# Altium PCB Upperarm2_GPT_Backup.PcbDoc
Units mil, origin at the board's own origin, x right, y up, seen from the top; angles counter-clockwise.
Board outline 17000 x 4500 mil, 2 copper layers (Top Layer, Bottom Layer); 8 components, 9 nets, 98 pads, 0 vias.
Unrouted connection lines stored in the file: 18.
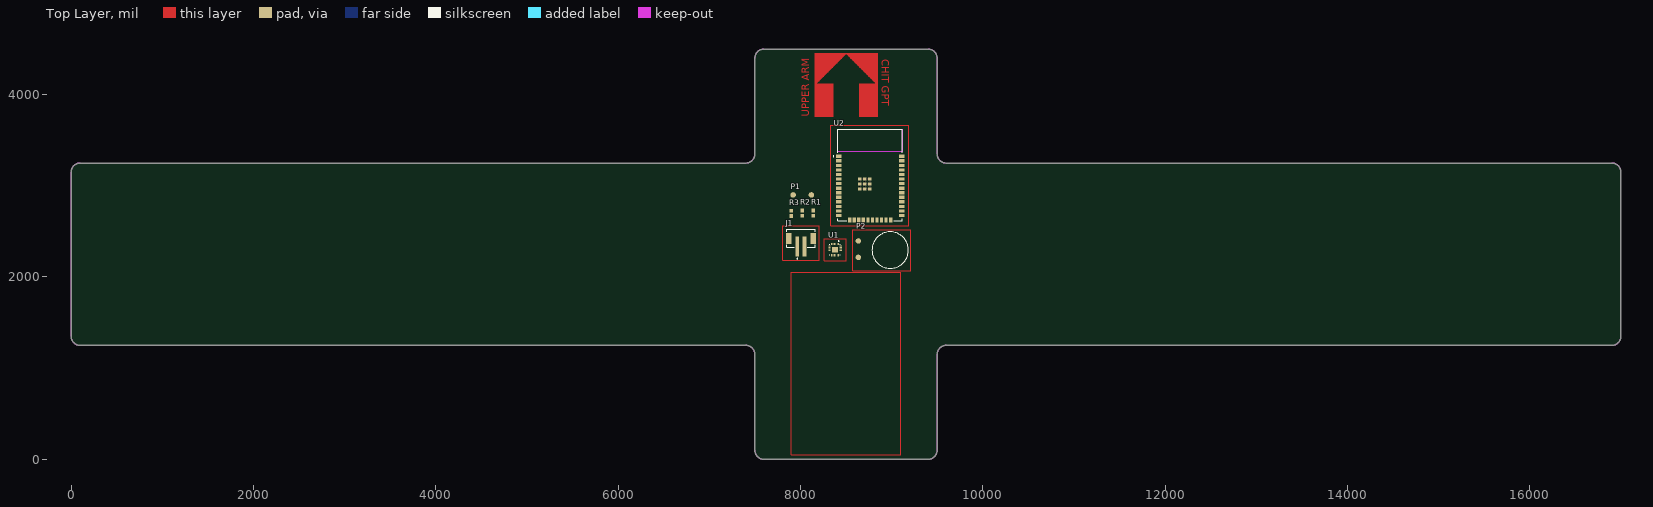
[diagram p0: Top Layer view]
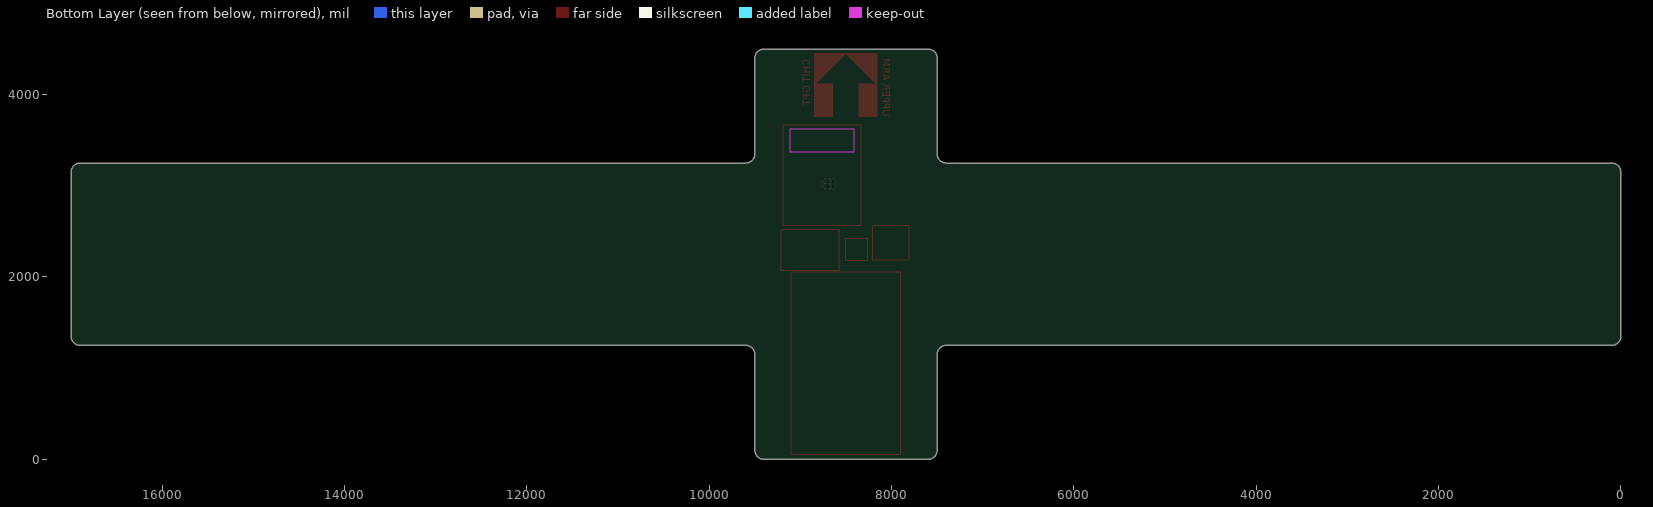
[diagram p1: Bottom Layer view, seen from below]

## Layer stack, top to bottom
Top Solder: solder mask 0.4724, FC-001, Dk 4
Top Solder: solder mask 0.4, Solder Resist, Dk 3.5
Top Layer: signal copper 1.4
Dielectric 1: dielectric 12.6, FR-4, Dk 4.8
Bottom Layer: signal copper 1.4
Flex Bottom Coverlay: solder mask 0.4, Solder Resist, Dk 3.5
Flex Bottom Coverlay: solder mask 0.4724, FC-001, Dk 4

## Board outline
7500,100 7500,1150 ccw(c7400,1150) 7400,1250 100,1250 cw(c100,1350) 0,1350 0,3150 cw(c100,3150) 100,3250 7400,3250 ccw(c7400,3350) 7500,3350 7500,4400 cw(c7600,4400) 7600,4500 9400,4500 cw(c9400,4400) 9500,4400 9500,3350 ccw(c9600,3350) 9600,3250 16900,3250 cw(c16900,3150) 17000,3150 17000,1350 cw(c16900,1350) 16900,1250 9600,1250 ccw(c9600,1150) 9500,1150 9500,100 cw(c9400,100) 9400,0 7600,0 cw(c7600,100)
board region Main: 9250,0 7750,0 7750,4500 9250,4500
board region "Left Strap": 9250,4500 9400,4500 9409.85,4500 9429.17,4496.16 9447.37,4488.62 9463.75,4477.68 9477.68,4463.75 9488.62,4447.37 9496.16,4429.17 9500,4409.85 9500,4400 9500,3350 9500.48,3340.2 9504.31,3320.97 9511.81,3302.86 9522.7,3286.56 9536.56,3272.7 9552.86,3261.81 9570.97,3254.31 9590.2,3250.48 9600,3250 16900,3250 16909.85,3250 16929.17,3246.16 16947.37,3238.62 16963.75,3227.68 16977.68,3213.75 16988.62,3197.37 16996.16,3179.17 17000,3159.85 17000,3150 17000,1350 17000,1340.15 16996.16,1320.83 16988.62,1302.63 16977.68,1286.25 16963.75,1272.32 16947.37,1261.38 16929.17,1253.84 16909.85,1250 16900,1250 9600,1250 9590.2,1249.52 9570.97,1245.69 9552.86,1238.19 9536.56,1227.3 9522.7,1213.44 9511.81,1197.14 9504.31,1179.03 9500.48,1159.8 9500,1150 9500,100 9500,90.15 9496.16,70.83 9488.62,52.63 9477.68,36.25 9463.75,22.32 9447.37,11.38 9429.17,3.84 9409.85,0 9400,0 9250,0
board region "Right Strap": 7750,0 7600,0 7590.15,0 7570.83,3.84 7552.63,11.38 7536.25,22.32 7522.32,36.25 7511.38,52.63 7503.84,70.83 7500,90.15 7500,100 7500,1150 7499.52,1159.8 7495.69,1179.03 7488.19,1197.14 7477.3,1213.44 7463.44,1227.3 7447.14,1238.19 7429.03,1245.69 7409.8,1249.52 7400,1250 100,1250 90.15,1250 70.83,1253.84 52.63,1261.38 36.25,1272.32 22.32,1286.25 11.38,1302.63 3.84,1320.83 0,1340.15 0,1350 0,3150 0,3159.85 3.84,3179.17 11.38,3197.37 22.32,3213.75 36.25,3227.68 52.63,3238.62 70.83,3246.16 90.15,3250 100,3250 7400,3250 7409.8,3250.48 7429.03,3254.31 7447.14,3261.81 7463.44,3272.7 7477.3,3286.56 7488.19,3302.86 7495.69,3320.97 7499.52,3340.2 7500,3350 7500,4400 7500,4409.85 7503.84,4429.17 7511.38,4447.37 7522.32,4463.75 7536.25,4477.68 7552.63,4488.62 7570.83,4496.16 7590.15,4500 7600,4500 7750,4500

## Design rules (kind name [scope] priority, off if disabled: settings)
Clearance [All] p1: gap=10 ignorepadtopadclearanceinfootprint=FALSE except(0: Arc-Hole Track-Hole SMDPad-Hole THPad-Hole Via-Hole Fill-Hole Poly-Hole Region-Hole Text-Hole)
PolygonConnect [All] p1: connectstyle=Relief reliefconductorwidth=10 reliefentries=4 polygonreliefangle="90 Angle" airgapwidth=10
RoutingVias [All] p1: holewidth=28 width=50 viastyle="Through Hole" minholewidth=28 minwidth=50 maxholewidth=28 maxwidth=50
SolderMaskExpansion [All] p1: expansion=4 istentingtop=FALSE
Width [All] p1: maxlimit=10 minlimit=10 preferedwidth=10 substack1={0EA1E346-DF71-40D0-BE09-5F43E7521303}
30 further rules are at their usual default settings.

## Components (designator, comment, footprint, x,y, rotation, side; value= is the part's Value field where it differs from the comment)
J1 "B2B-PH-SM4-TB" JST_B2B-PH-SM4-TB 8005.63,2423.58 r0 top
P1 "Strain Gauge" "Strain Gauge" 8020,2900 r0 top
P2 "Vibe Motor" "Vibe Motor" 8985,2295 r90 top
R1 "RC0603FR-07100RL" RESC1607X60N 8140,2700 r90 top
R2 "RC0603FR-07100RL" RESC1607X60N 8020,2701.06 r90 top
R3 "RC0603FR-07100RL" RESC1607X60N 7900,2698.94 r90 top
U1 "MPU-6500" QFN40P300X300X95-25N 8380,2300 r270 top
U2 "ESP32-WROOM-32E_(16MB)" XCVR_ESP32-WROOM-32E_(16MB) 8765,3117.13 r0 top

## Footprints (in the part's own frame and the unit in brackets; to place one, negate y for a bottom-side part, rotate by r counter-clockwise, add the part's x,y. Pads: shape width x height; smd on the part's side, far side on the other; paste and mask are expansions set on the pad)
JST_B2B-PH-SM4-TB [mm]
  rect 1x5.5 smd: 1(-1,-2.25) 2(1,-2.25)
  rect 1.6x3 smd: S1(-3.4,0) S2(3.4,0)
  silkscreen extent -3.98,-5.76 3.98,2.5, body extent -3.98,-4.5 3.98,2.5, height 6.75
QFN40P300X300X95-25N [mm]
  rrect25% 0.64x0.22 smd: 1(-1.545,1) 2(-1.545,0.6) 3(-1.545,0.2) 4(-1.545,-0.2) 5(-1.545,-0.6) 6(-1.545,-1) 13(1.545,-1) 14(1.545,-0.6) 15(1.545,-0.2) 16(1.545,0.2) 17(1.545,0.6) 18(1.545,1)
  rrect25% 0.22x0.64 smd: 7(-1,-1.545) 8(-0.6,-1.545) 9(-0.2,-1.545) 10(0.2,-1.545) 11(0.6,-1.545) 12(1,-1.545) 19(1,1.545) 20(0.6,1.545) 21(0.2,1.545) 22(-0.2,1.545) 23(-0.6,1.545) 24(-1,1.545)
  rect 1.54x1.7 smd paste-2: 25(0,0)
  silkscreen extent -2.48,-1.5 1.5,1.5
RESC1607X60N [mm]
  rect 1.04x1.02 smd: 1(-0.735,0) 2(0.735,0)
"Strain Gauge" [mil]
  round 60 smd: 1(-100,0) 2(100,0)
"Vibe Motor" [mil]
  round 60 smd: 1(-80,350) 2(100,350)
  silkscreen extent -200,-200 200,200
XCVR_ESP32-WROOM-32E_(16MB) [mm]
  rect 1.5x0.9 smd: 1(-8.75,5.26) 2(-8.75,3.99) 3(-8.75,2.72) 4(-8.75,1.45) 5(-8.75,0.18) 6(-8.75,-1.09) 7(-8.75,-2.36) 8(-8.75,-3.63) 9(-8.75,-4.9) 10(-8.75,-6.17) 11(-8.75,-7.44) 12(-8.75,-8.71) 13(-8.75,-9.98) 14(-8.75,-11.25) 25(8.75,-11.25) 26(8.75,-9.98) 27(8.75,-8.71) 28(8.75,-7.44) 29(8.75,-6.17) 30(8.75,-4.9) 31(8.75,-3.63) 32(8.75,-2.36) 33(8.75,-1.09) 34(8.75,0.18) 35(8.75,1.45) 36(8.75,2.72) 37(8.75,3.99) 38(8.75,5.26)
  rect 0.9x1.5 smd: 15(-5.715,-12.5) 16(-4.445,-12.5) 17(-3.175,-12.5) 18(-1.905,-12.5) 19(-0.635,-12.5) 20(0.635,-12.5) 21(1.905,-12.5) 22(3.175,-12.5) 23(4.445,-12.5) 24(5.715,-12.5)
  rect 0.9x0.9 smd: 39_1(-2.9,-1.06) 39_2(-1.5,-1.06) 39_3(-0.1,-1.06) 39_4(-2.9,-2.46) 39_5(-1.5,-2.46) 39_6(-0.1,-2.46) 39_7(-2.9,-3.86) 39_8(-1.5,-3.86) 39_9(-0.1,-3.86)
  round 0.3 hole 0.2 mask+0: 39_10(-2.2,-1.06) 39_11(-0.8,-1.06) 39_12(-2.9,-1.76) 39_13(-1.5,-1.76) 39_14(-0.1,-1.76) 39_15(-2.2,-2.46) 39_16(-0.8,-2.46) 39_17(-2.9,-3.16) 39_18(-1.5,-3.16) 39_19(-0.1,-3.16) 39_20(-2.2,-3.86) 39_21(-0.8,-3.86)
  Keep-Out Layer region: 9,6.56 -9,6.56 -9,12.75 9,12.75
  silkscreen extent -10.3,-12.75 9,12.75, body extent -9,-12.75 9,12.75, height 3.25

## Part data
J1: "Connector Header Surface Mount 2 position 0.079 (2.00mm)", Package="NON STANDARD-2 JST", Availability="In Stock", Check_prices=https://www.snapeda.com/parts/B2B-PH-SM4-TB/JST/view-part/?ref=eda, MF=JST, MP=B2B-PH-SM4-TB, Price=None, Purchase-URL=https://pricing.snapeda.com/search/part/B2B-PH-SM4-TB/?ref=eda, SnapEDA_Link=https://www.snapeda.com/parts/B2B-PH-SM4-TB/JST/view-part/?ref=snap
R1 R2 R3: "RES SMT 100R 1% 0603 T/R PICK#92931", Package=None, Availability=Unavailable, MP=RC0603FR-07100RL, Price=None
U1: "Accelerometer, Gyroscope, 6 Axis Sensor IÂ²C, SPI Output", Package="QFN-24 TDK", Availability=Warning, DigiKey-Purchase-URL=https://snapeda.com/shop?store=DigiKey&id=48597, MF="TDK InvenSense", Mouser-Purchase-URL=https://snapeda.com/shop?store=Mouser&id=48597, MP=MPU-6500, Price=None, SnapEDA_Link=https://www.snapeda.com/parts/MPU-6500/TDK%20InvenSense/view-part/48597/?ref=snap
U2: "Bluetooth, WiFi 802.11b/g/n, Bluetooth v4.2 +EDR, Class 1, 2 and 3 Transceiver Module 2.4GHz ~ 2.5GHz Integrated, Trace Surface Mount", Package=None, Availability="Not in stock", Check_prices=https://www.snapeda.com/parts/ESP32-WROOM-32E%20(16MB)/Espressif+Systems/view-part/?ref=eda, MF="Espressif Systems", MP="ESP32-WROOM-32E (16MB)", Price=None, SnapEDA_Link=https://www.snapeda.com/parts/ESP32-WROOM-32E%20(16MB)/Espressif+Systems/view-part/?ref=snap

## Nets (pads, with @x,y where several pads share a name; then routed paths per layer and width w, separated by ;. In a path a pad name is that pad's centre, name@x,y a point inside that pad or via, vN(x,y) a via of type N, cw(c..) or ccw(c..) an arc to the next point about the centre after c; other vN are vias at no path point)
3.3V: J1.1 R1.1 R2.1 U1.13 U2.2
ADO/SDO: U1.9 U2.31
GND: J1.2 P1.1 P2.2 R3.2 U1.18 U2.1
NetP1_2: P1.2 R1.2 U2.6
NetR2_2: R2.2 R3.1 U2.7
NetU1_22: U1.22 U2.29
NetU1_23: U1.23 U2.30
NetU1_24: U1.24 U2.37
VIB: P2.1 U2.27
pads on no net: J1.S1 J1.S2 U1.1 U1.2 U1.3 U1.4 U1.5 U1.6 U1.7 U1.8 U1.10 U1.11 U1.12 U1.14 U1.15 U1.16 U1.17 U1.19 U1.20 U1.21 U1.25 U2.3 U2.4 U2.5 U2.8 U2.9 U2.10 U2.11 U2.12 U2.13 U2.14 U2.15 U2.16 U2.17 U2.18 U2.19 U2.20 U2.21 U2.22 U2.23 U2.24 U2.25 U2.26 U2.28 U2.32 U2.33 U2.34 U2.35 U2.36 U2.38 U2.39_1 U2.39_2 U2.39_3 U2.39_4 U2.39_5 U2.39_6 U2.39_7 U2.39_8 U2.39_9 U2.39_10 U2.39_11 U2.39_12 U2.39_13 U2.39_14 U2.39_15 U2.39_16 U2.39_17 U2.39_18 U2.39_19 U2.39_20 U2.39_21
copper on no net: | length 15020
  Top Layer w10: 7805,2185 8205,2185 8205,2560 7805,2560 7805,2185 ; 7900,50 9100,50 9100,2050 7900,2050 7900,50 ; 8260,2180 8505,2180 8505,2420 8260,2420 8260,2180 ; 8330,2560 9190,2560 9190,3665 8330,3665 8330,2560 ; 8575,2070 9210,2070 9210,2520 8575,2520 8575,2070

## Polygon pours and split planes (outlines as drawn)
no net on Layer0 "Default Coverlay 2 Top" (split plane): 9250,4500 9409.85,4500 9429.17,4496.16 9447.37,4488.62 9463.75,4477.68 9477.68,4463.75 9488.62,4447.37 9496.16,4429.17 9500,4409.85 9500,3350 9500.48,3340.2 9504.31,3320.97 9511.81,3302.86 9522.7,3286.56 9536.56,3272.7 9552.86,3261.81 9570.97,3254.31 9590.2,3250.48 9600,3250 16909.85,3250 16929.17,3246.16 16947.37,3238.62 16963.75,3227.68 16977.68,3213.75 16988.62,3197.37 16996.16,3179.17 17000,3159.85 17000,1340.15 16996.16,1320.83 16988.62,1302.63 16977.68,1286.25 16963.75,1272.32 16947.37,1261.38 16929.17,1253.84 16909.85,1250 9600,1250 9590.2,1249.52 9570.97,1245.69 9552.86,1238.19 9536.56,1227.3 9522.7,1213.44 9511.81,1197.14 9504.31,1179.03 9500.48,1159.8 9500,1150 9500,90.15 9496.16,70.83 9488.62,52.63 9477.68,36.25 9463.75,22.32 9447.37,11.38 9429.17,3.84 9409.85,0 9250,0
no net on Layer0 "Default Coverlay 2 Top" (split plane): 7750,0 7590.15,0 7570.83,3.84 7552.63,11.38 7536.25,22.32 7522.32,36.25 7511.38,52.63 7503.84,70.83 7500,90.15 7500,1150 7499.52,1159.8 7495.69,1179.03 7488.19,1197.14 7477.3,1213.44 7463.44,1227.3 7447.14,1238.19 7429.03,1245.69 7409.8,1249.52 7400,1250 90.15,1250 70.83,1253.84 52.63,1261.38 36.25,1272.32 22.32,1286.25 11.38,1302.63 3.84,1320.83 0,1340.15 0,1350 0,3159.85 3.84,3179.17 11.38,3197.37 22.32,3213.75 36.25,3227.68 52.63,3238.62 70.83,3246.16 90.15,3250 7400,3250 7409.8,3250.48 7429.03,3254.31 7447.14,3261.81 7463.44,3272.7 7477.3,3286.56 7488.19,3302.86 7495.69,3320.97 7499.52,3340.2 7500,3350 7500,4409.85 7503.84,4429.17 7511.38,4447.37 7522.32,4463.75 7536.25,4477.68 7552.63,4488.62 7570.83,4496.16 7590.15,4500 7750,4500
no net on Layer0 "Default Coverlay 2 Bottom" (split plane): 9250,4500 9409.85,4500 9429.17,4496.16 9447.37,4488.62 9463.75,4477.68 9477.68,4463.75 9488.62,4447.37 9496.16,4429.17 9500,4409.85 9500,3350 9500.48,3340.2 9504.31,3320.97 9511.81,3302.86 9522.7,3286.56 9536.56,3272.7 9552.86,3261.81 9570.97,3254.31 9590.2,3250.48 9600,3250 16909.85,3250 16929.17,3246.16 16947.37,3238.62 16963.75,3227.68 16977.68,3213.75 16988.62,3197.37 16996.16,3179.17 17000,3159.85 17000,1340.15 16996.16,1320.83 16988.62,1302.63 16977.68,1286.25 16963.75,1272.32 16947.37,1261.38 16929.17,1253.84 16909.85,1250 9600,1250 9590.2,1249.52 9570.97,1245.69 9552.86,1238.19 9536.56,1227.3 9522.7,1213.44 9511.81,1197.14 9504.31,1179.03 9500.48,1159.8 9500,1150 9500,90.15 9496.16,70.83 9488.62,52.63 9477.68,36.25 9463.75,22.32 9447.37,11.38 9429.17,3.84 9409.85,0 9250,0
no net on Layer0 "Default Coverlay 2 Bottom" (split plane): 7750,0 7590.15,0 7570.83,3.84 7552.63,11.38 7536.25,22.32 7522.32,36.25 7511.38,52.63 7503.84,70.83 7500,90.15 7500,1150 7499.52,1159.8 7495.69,1179.03 7488.19,1197.14 7477.3,1213.44 7463.44,1227.3 7447.14,1238.19 7429.03,1245.69 7409.8,1249.52 7400,1250 90.15,1250 70.83,1253.84 52.63,1261.38 36.25,1272.32 22.32,1286.25 11.38,1302.63 3.84,1320.83 0,1340.15 0,1350 0,3159.85 3.84,3179.17 11.38,3197.37 22.32,3213.75 36.25,3227.68 52.63,3238.62 70.83,3246.16 90.15,3250 7400,3250 7409.8,3250.48 7429.03,3254.31 7447.14,3261.81 7463.44,3272.7 7477.3,3286.56 7488.19,3302.86 7495.69,3320.97 7499.52,3340.2 7500,3350 7500,4409.85 7503.84,4429.17 7511.38,4447.37 7522.32,4463.75 7536.25,4477.68 7552.63,4488.62 7570.83,4496.16 7590.15,4500 7750,4500

## Keep-outs
Top Layer:
  the board outline again, w10

## Other copper
Top Layer:
  region: 305 vertices and 0 holes, not listed, extent 8154.74,3759.48 8849.74,4454.48
  text "CHIT GPT" at 8890,4390 h80 r270
  text "UPPER ARM" at 8095,3755 h80 r90

## Text inside footprints (layer, text, board x,y; h text height)
U2: Mechanical 13 "ANTENNA" at 8528.78,3471.46 h70